# Altium PCB PCB-RBB.PcbDoc
Units mil, origin at the board's own origin, x right, y up, seen from the top; angles counter-clockwise.
Board outline 6000 x 4000 mil, 2 copper layers (Top Layer, Bottom Layer); 12 components, 15 nets, 55 pads, 0 vias.
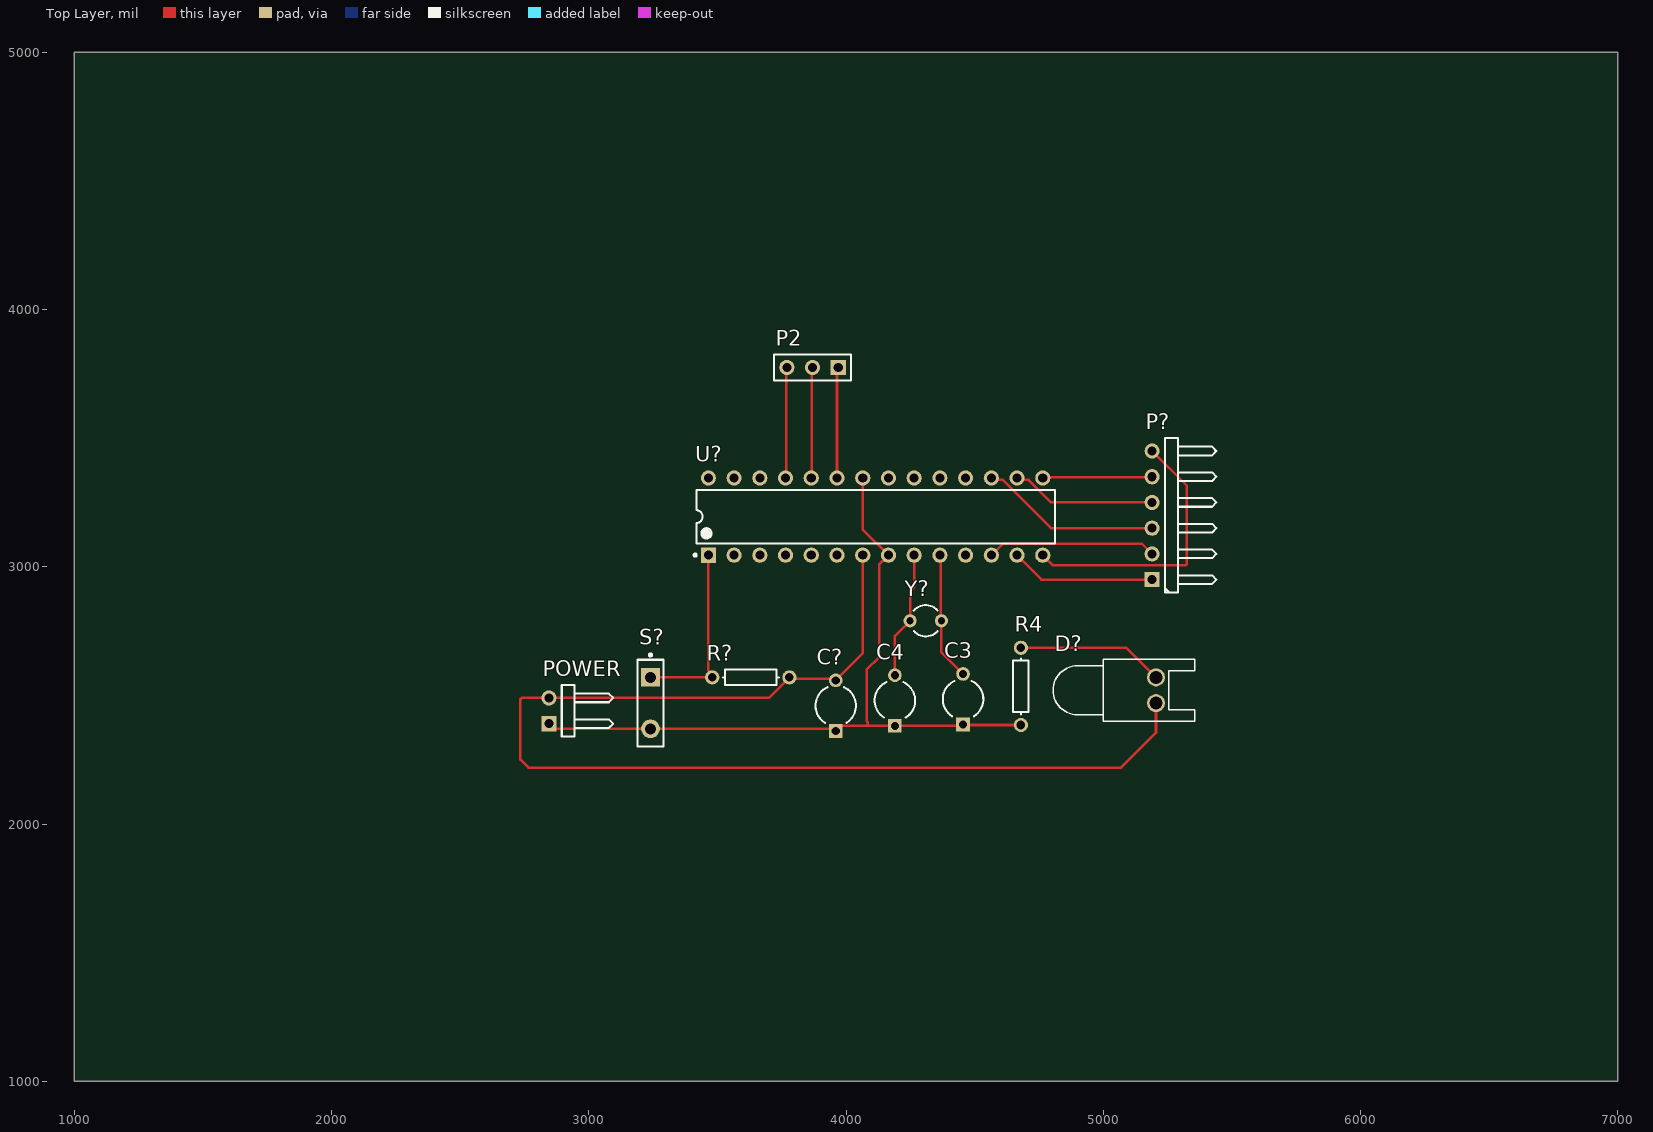
[diagram p0: Top Layer view]
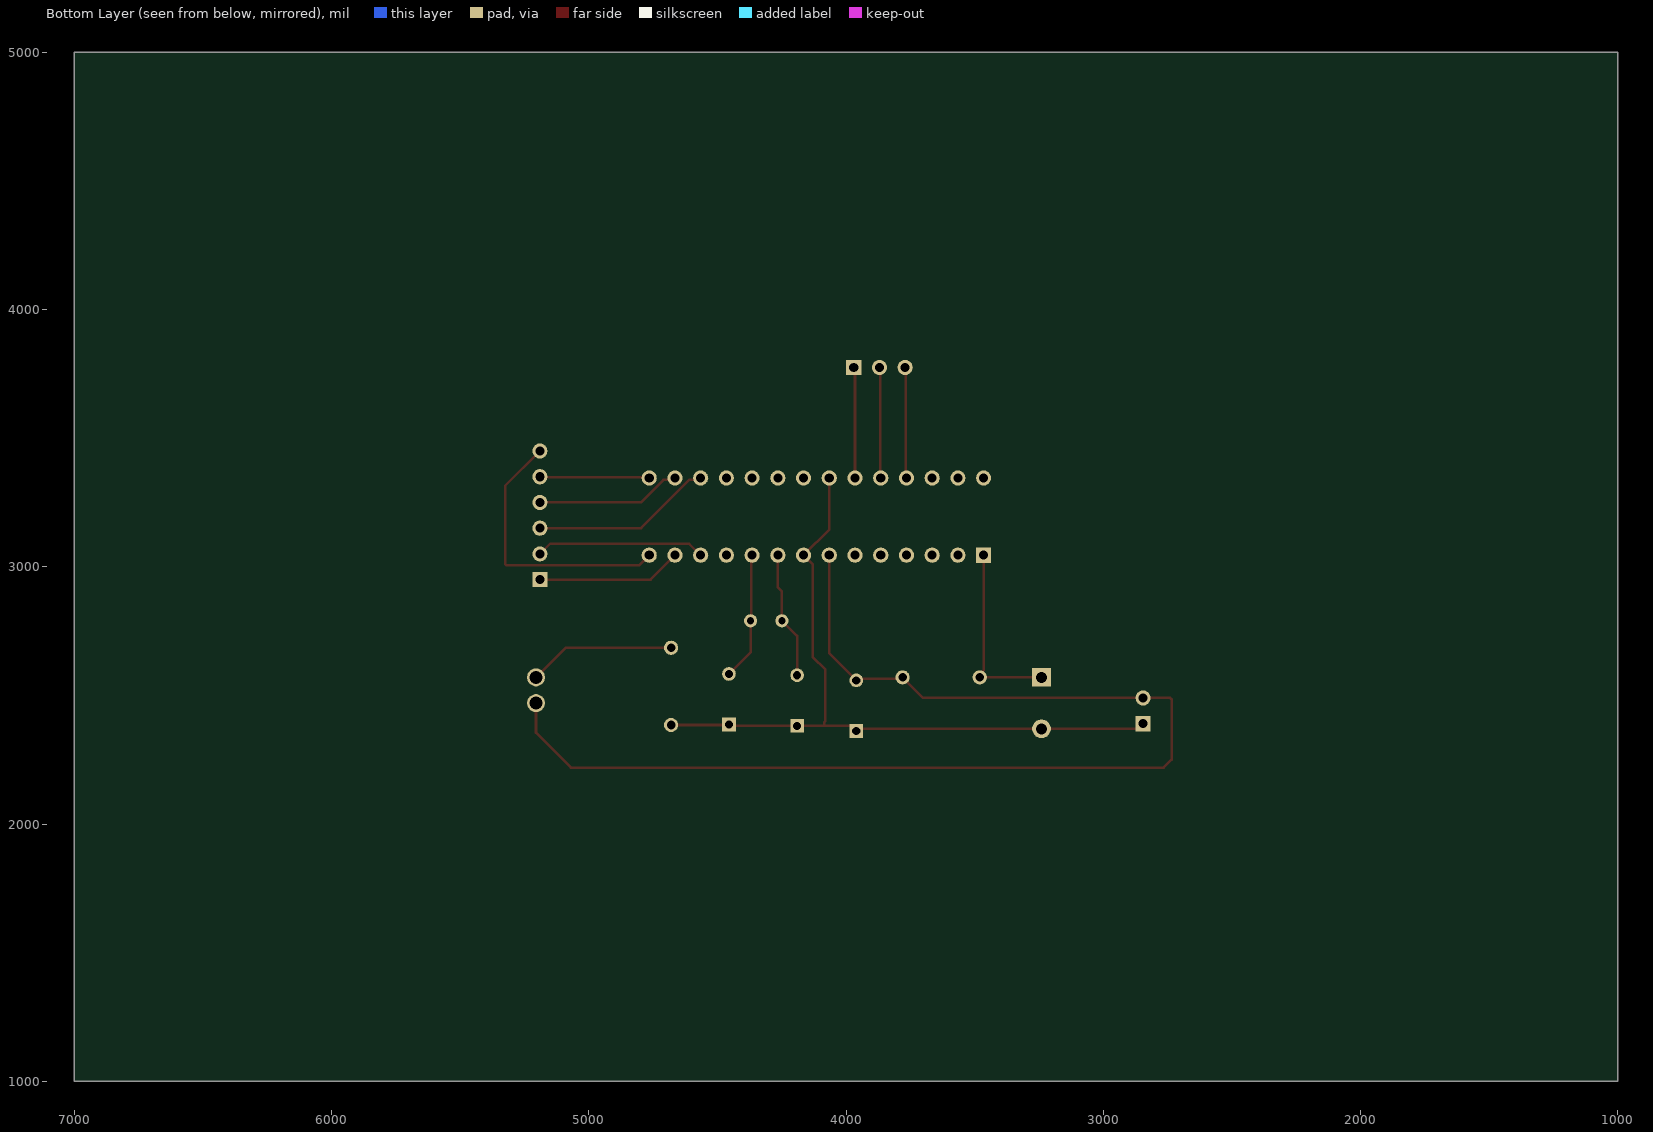
[diagram p1: Bottom Layer view, seen from below]

## Layer stack, top to bottom
Top Solder: solder mask 0.4, Solder Resist, Dk 3.5
Top Layer: signal copper 1.4
Dielectric 1: dielectric 12.6, FR-4, Dk 4.8
Bottom Layer: signal copper 1.4
Bottom Solder: solder mask 0.4, Solder Resist, Dk 3.5

## Board outline
1000,1000 7000,1000 7000,5000 1000,5000

## Design rules (kind name [scope] priority, off if disabled: settings)
Clearance [All] p1: gap=10 ignorepadtopadclearanceinfootprint=FALSE
PolygonConnect [All] p1: connectstyle=Relief reliefconductorwidth=10 reliefentries=4 polygonreliefangle="90 Angle" airgapwidth=10
RoutingVias [All] p1: holewidth=28 width=50 viastyle="Through Hole" minholewidth=28 minwidth=50 maxholewidth=28 maxwidth=50
SolderMaskExpansion [All] p1: expansion=4 istentingtop=FALSE
Width [All] p1: maxlimit=10 minlimit=10 preferedwidth=10
30 further rules are at their usual default settings.

## Components (designator, comment, footprint, x,y, rotation, side; value= is the part's Value field where it differs from the comment)
C3 "Cap2" CAPR5-4X5 4455,2485 r90 top value=100pF
C4 "Cap2" CAPR5-4X5 4190,2480 r90 top value=100pF
C? "Cap2" CAPR5-4X5 3960,2460 r90 top value=100pF
D? "LED0" LED-0 5205,2520 r270 top
P2 "INPUT SENSOR" HDR1X3 3970,3775 r180 top
P? "Header 6H" HDR1X6H 5190,2950 r90 top
POWER "Header 2H" HDR1X2H 2845,2390 r90 top
R4 "Res1" AXIAL-0.3 4680,2535 r270 top value=1K
R? "Res1" AXIAL-0.3 3630,2570 r0 top value=1K
S? "SW-PB" SPST-2 3240,2470 r270 top
U? "ATmega8A-PU" 28P3 4115,3195 r90 top
Y? "XTAL" R38 4310,2790 r270 top

## Footprints (in the part's own frame and the unit in brackets; to place one, negate y for a bottom-side part, rotate by r counter-clockwise, add the part's x,y. Pads: shape width x height; smd on the part's side, far side on the other; paste and mask are expansions set on the pad)
28P3 [mm] "28-Pin Plastic Dual In-Line Package (PDIP)"
  rect 1.5x1.5 hole 0.9: 1(-3.81,16.51)
  round 1.5 hole 0.9: 2(-3.81,13.97) 3(-3.81,11.43) 4(-3.81,8.89) 5(-3.81,6.35) 6(-3.81,3.81) 7(-3.81,1.27) 8(-3.81,-1.27) 9(-3.81,-3.81) 10(-3.81,-6.35) 11(-3.81,-8.89) 12(-3.81,-11.43) 13(-3.81,-13.97) 14(-3.81,-16.51) 15(3.81,-16.51) 16(3.81,-13.97) 17(3.81,-11.43) 18(3.81,-8.89) 19(3.81,-6.35) 20(3.81,-3.81) 21(3.81,-1.27) 22(3.81,1.27) 23(3.81,3.81) 24(3.81,6.35) 25(3.81,8.89) 26(3.81,11.43) 27(3.81,13.97) 28(3.81,16.51)
  silkscreen extent -3.93,-17.7 2.65,17.93, body extent -3.6,-17.65 3.6,17.65, height 4.58
AXIAL-0.3 [mm] "Axial Device, Thru-Hole; 2 Leads; 0.3 in Pin Spacing"
  round 1.4 hole 0.85: 1(-3.81,0) 2(3.81,0)
  silkscreen extent -2.77,-0.76 2.77,0.76
CAPR5-4X5 [mm] "Capacitor; 2 Leads"
  rect 1.35x1.35 hole 0.8: 1(-2.5,0)
  round 1.35 hole 0.8: 2(2.5,0)
  silkscreen extent -1.69,-2 1.82,2
HDR1X2H [mm] "Connector; Header; 2 Position; Right Angle"
  rect 1.5x1.5 hole 0.9: 1(0,0)
  round 1.5 hole 0.9: 2(2.54,0)
  silkscreen extent -1.27,-6.35 3.81,-1.27
HDR1X3 [mm] "Connector; Header; 3 Position"
  rect 1.5x1.5 hole 0.9: 1(0,0)
  round 1.5 hole 0.9: 2(2.54,0) 3(5.08,0)
  silkscreen extent -1.27,-1.27 6.35,1.27
HDR1X6H [mm] "Connector; Header; 6 Position; Right Angle"
  rect 1.5x1.5 hole 0.9: 1(0,0)
  round 1.5 hole 0.9: 2(2.54,0) 3(5.08,0) 4(7.62,0) 5(10.16,0) 6(12.7,0)
  silkscreen extent -1.27,-6.35 13.97,-1.27
LED-0 [mil] "LED; 2 Leads"
  round 70 hole 50: 1(50,0) 2(-50,0)
  silkscreen extent -120,-400 120,150
R38 [mm] "Crystal, Thru-Hole; 2 Leads; Body 3.1 x 8.2 mm (Dia.xH)"
  round 1.3 hole 0.7: 1(0,1.55) 2(0,-1.55)
  silkscreen extent -1.55,-1.19 1.55,1.17
SPST-2 [mm] "Switch; 2 Leads"
  rect 1.85x1.85 hole 1.1: 1(-2.54,0)
  round 1.85 hole 1.1: 2(2.54,0)
  silkscreen extent -4.89,-1.27 4.28,1.27

## Part data
C3 C4 C?: "Capacitor", PackageDescription="Capacitor; 2 Leads", PackageReference=CAPR5-4X5, Published=23-Sep-2002, Publisher="Altium Limited"
D?: "Typical INFRARED GaAs LED", LatestRevisionDate=08-Jul-2005, LatestRevisionNote="Mech Layer 1 removed.", PackageDescription="LED; 2 Leads", PackageReference=LED-0, Published=8-Jun-2000, Publisher="Altium Limited"
P2: library part "Header 3", "Header, 3-Pin", LatestRevisionDate=17-Jul-2002, LatestRevisionNote="Re-released for DXP Platform.", Publisher="Altium Limited"
P?: "Header, 6-Pin, Right Angle", LatestRevisionDate=17-Jul-2002, LatestRevisionNote="Re-released for DXP Platform.", Publisher="Altium Limited"
POWER: "Header, 2-Pin, Right Angle", LatestRevisionDate=17-Jul-2002, LatestRevisionNote="Re-released for DXP Platform.", Publisher="Altium Limited"
R4 R?: "Resistor", LatestRevisionDate=17-Jul-2002, LatestRevisionNote="Re-released for DXP Platform.", PackageDescription="Axial Device, Thru-Hole; 2 Leads; 0.3 in Pin Spacing", PackageReference=AXIAL-0.3, Published=8-Jun-2000, Publisher="Altium Limited"
S?: "Switch", LatestRevisionDate=17-Jul-2002, LatestRevisionNote="Re-released for DXP Platform.", PackageDescription="Switch; 2 Leads", PackageReference=SPST-2, Published=24-Mar-1999, Publisher="Altium Limited"
U?: "8-bit AVR Microcontroller, 2.7-5.5V, 16MHz, 8KB Flash, 512 Bytes EEPROM, 1KB SRAM, 28-pin PDIP, Industrial Grade (-40°C to 85°C)", ComponentLink1Description="Manufacturer URL", ComponentLink1URL=http://www.atmel.com/, ComponentLink2Description="ATmega8A Datasheet", ComponentLink2URL=http://www.atmel.com/dyn/resources/prod_documents/doc8159.pdf, ComponentLink3Description="ATmega8A Summary", ComponentLink3URL=http://www.atmel.com/dyn/resources/prod_documents/8159S.pdf, DatasheetVersion="revD, Feb-2011", PackageDescription="28-lead (0.300\"/7.62mm Wide) Plastic Dual Inline Package (PDIP)", PackageReference=28P3, PackageVersion="revB, Sep-2001"
Y?: "Crystal Oscillator", LatestRevisionDate=17-Jul-2002, LatestRevisionNote="Re-released for DXP Platform.", PackageDescription="Crystal, Thru-Hole; 2 Leads; Body 3.1 x 8.2 mm (Dia.xH)", PackageReference=R38, Published=8-Jun-2000, Publisher="Altium Limited"

## Nets (pads, with @x,y where several pads share a name; then routed paths per layer and width w, separated by ;. In a path a pad name is that pad's centre, name@x,y a point inside that pad or via, vN(x,y) a via of type N, cw(c..) or ccw(c..) an arc to the next point about the centre after c; other vN are vias at no path point)
1: P?.6 U?.14 | length 1073.4
  Top Layer w10: U?.14 4804.53,3005.47 5319.14,3005.47 5325,3011.33 5325,3315 P?.6
2: P?.5 U?.15 | length 427.1
  Top Layer w10: U?.15 4767.5,3347.5 5187.5,3347.5 P?.5
3: P?.4 U?.16 | length 564.4
  Top Layer w10: U?.16 4672.5,3337.5 4709.53,3337.5 4797.03,3250 P?.4
4: P?.3 U?.17 | length 705.8
  Top Layer w10: U?.17 4572.5,3337.5 4609.53,3337.5 4797.03,3150 P?.3
5: P?.2 U?.12 | length 659.8
  Top Layer w10: U?.12 4609.53,3089.53 5150.47,3089.53 P?.2
6: P?.1 U?.13 | length 564.4
  Top Layer w10: U?.13 4760,2950 P?.1
GND: C3.1 C4.1 C?.1 POWER.1 R4.2 S?.2 U?.8 U?.22 | length 2899.9
  Top Layer w10: POWER.1 2865,2370 S?.2 3951.57,2370 C?.1 3980,2381.57 4085,2381.57 ; U?.22 4065,3145 U?.8 4130,3010 4130,2650 4080,2600 4080,2400 4085,2395 4085,2381.57 ; R4.2 4456.57,2385 C3.1 4450,2381.57 C4.1 4085,2381.57
NetC3_2: C3.2 U?.10 Y?.1 | length 498.9
  Top Layer w10: U?.10 4368.01,3041.99 4368.01,2793.01 Y?.1 4371.02,2667.4 C3.2
NetC4_2: C4.2 U?.9 Y?.2 | length 497.6
  Top Layer w10: C4.2 4190,2731.02 Y?.2 4248.98,2903.73 4265,2919.75 U?.9
NetD?_2: D?.2 R4.1 | length 572.6
  Top Layer w10: R4.1 5090,2685 D?.2
NetP2_1: P2.1 U?.23 | length 432.1
  Top Layer w10: U?.23 3965,3770 P2.1
NetP2_2: P2.2 U?.24 | length 432.1
  Top Layer w10: U?.24 3867.5,3347.5 3867.5,3772.5 P2.2
NetP2_3: P2.3 U?.25 | length 432.1
  Top Layer w10: U?.25 3767.5,3347.5 3767.5,3772.5 P2.3
NetR?_1: R?.1 S?.1 U?.1 | length 721.2
  Top Layer w10: S?.1 R?.1 3480,2582.21 3465,2597.21 U?.1
VCC: C?.2 D?.1 POWER.2 R?.2 U?.7 | length 4684.8
  Top Layer w10: U?.7 4065,2663.43 C?.2 3954.21,2564.21 3785.79,2564.21 R?.2 3700,2490 POWER.2 2740,2490 2734.14,2484.14 2734.14,2250.86 2765.86,2219.14 5069.14,2219.14 5205,2355 D?.1
pads on no net: U?.2 U?.3 U?.4 U?.5 U?.6 U?.11 U?.18 U?.19 U?.20 U?.21 U?.26 U?.27 U?.28